# Altium PCB 智能笔 - 充电.PCBDOC
Units mil, origin at the board's own origin, x right, y up, seen from the top; angles counter-clockwise.
Board outline 953.67 x 396.67 mil, 2 copper layers (TopLayer, BottomLayer); 12 components, 40 nets, 45 pads, 21 vias.
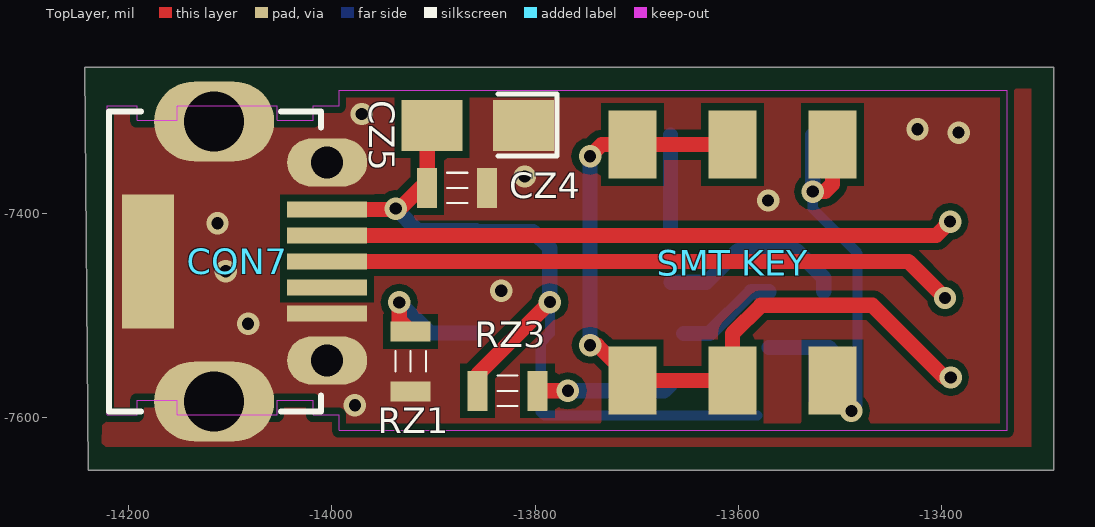
[diagram p0: TopLayer view]
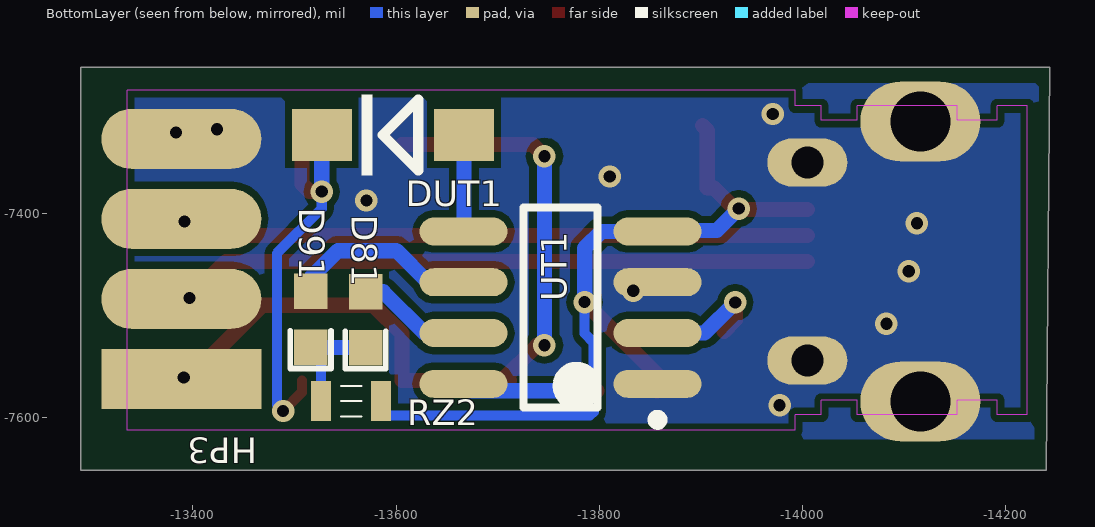
[diagram p1: BottomLayer view, seen from below]

## Layer stack, top to bottom
TopLayer: signal copper 1.4
Dielectric: core 12.6, FR-4, Dk 4.8
BottomLayer: signal copper 1.4

## Board outline
-14243.43,-7255.34 -13289.77,-7255.34 -13289.77,-7652.01 -14240.13,-7652.01

## Design rules (kind name [scope] priority, off if disabled: settings)
Clearance [All] p1: gap=7
ComponentClearance [All] p1 off: gap=10 collisioncheckmode=3
FanoutControl Fanout_LCC [All] p1 off: bgadir=Out bgaviamode=Centered fanoutstyle=Auto fanoutdirection=Alternating viagrid=1 // Protel DXP Scope 1 Expression Was: IsLCC   Fanout_LCC (Default Rule)
FanoutControl Fanout_BGA [All] p2 off: bgadir=Out bgaviamode=Centered fanoutstyle=Auto fanoutdirection=Alternating viagrid=1 // Protel DXP Scope 1 Expression Was: IsBGA   Fanout_BGA (Default Rule)
FanoutControl Fanout_SOIC [All] p3 off: bgadir=Out bgaviamode=Centered fanoutstyle=Auto fanoutdirection=Alternating viagrid=1 // Protel DXP Scope 1 Expression Was: IsSOIC   Fanout_SOIC (Default Rule)
FanoutControl Fanout_Default [All] p4: bgadir=Out bgaviamode=Centered fanoutstyle=Auto fanoutdirection=Alternating viagrid=1 // Fanout_Default (Default Rule)
FanoutControl Fanout_Small [All] p5 off: bgadir=Out bgaviamode=Centered fanoutstyle=Auto fanoutdirection=Alternating viagrid=1 // Protel DXP Scope 1 Expression Was: (CompPinCount < 5)   Fanout_Small (Default Rule)
PolygonConnect [All] p1: connectstyle=Direct reliefconductorwidth=10 reliefentries=4 polygonreliefangle="90 Angle"
RoutingVias [All] p1: holewidth=28 width=50 viastyle="Through Hole" minholewidth=28 minwidth=50 maxholewidth=28 maxwidth=50
SolderMaskExpansion [All] p1: expansion=4
TestPointUsage [All] p1: valid=0 allowmultiple=FALSE
Testpoint [(IsPad And (OnTopLayer Or OnBottomLayer))] p1: side=3 testpointundercomponent=TRUE minsize=40 maxsize=100 preferedsize=60 minholesize=20 maxholesize=40 preferedholesize=32 testpointgrid=1 style=297 order=-539222988
Width [All] p1: maxlimit=1111 minlimit=1 preferedwidth=10
12 further rules are at their usual default settings.

## Components (designator, comment, footprint, x,y, rotation, side; value= is the part's Value field where it differs from the comment)
CON7 "ZX62RD-AB-5P8" MICROUSB-B-H4 -14004.8,-7395.55 r0 top
CZ4 "104" 0603-1 -13876.8,-7374.41 r180 top
CZ5 "106" 0805 -13811.5,-7312.91 r180 top
D81 "LED_Red" 0603 -13569.89,-7503.53 r90 bottom
D91 "LED_Green" 0603 -13515.9,-7503.05 r90 bottom
DUT1 "SS14" DIODE_SOP -13666.82,-7322.28 r0 bottom
HP3 "Header 4" "2.0 4P 焊盘" -13388.57,-7562.33 r0 bottom
RZ1 "2K" 0603-1 -13922.66,-7545.1 r270 top
RZ2 "1.5K" 0603-1 -13555.73,-7584.21 r0 bottom
RZ3 "10K" 0603-1 -13827.22,-7574.08 r0 top
"SMT KEY" "Header 3X2" 拨动开关 -13507.27,-7331.67 r270 top locked
UT1 "TP4056" SOP-8P -13857.3,-7567.16 r0 bottom

## Footprints (in the part's own frame and the unit in brackets; to place one, negate y for a bottom-side part, rotate by r counter-clockwise, add the part's x,y. Pads: shape width x height; smd on the part's side, far side on the other; paste and mask are expansions set on the pad)
"2.0 4P 焊盘" [mm]
  rect 4x1.5 smd: 1(0,0)
  oval 4x1.5 smd: 2(0,-2) 3(0,-4) 4(0,-6)
0603 [mil]
  rect 35x33 smd: 1(-28,0) 2(27,0)
  silkscreen extent -49,-20 -12,20
0603-1 [mm] "1.6mm*0.8mm*0.8mm"
  rect 0.5x1 smd: 1(-0.75,0) 2(0.75,0)
  silkscreen extent -0.25,-0.38 0.25,0.38
0805 [mil]
  rect 60x50 smd: 1(0,0) 2(90,0)
  silkscreen extent -33,-31 25,30
DIODE_SOP [mm]
  rect 1.5x1.3 smd: 1(0,0) 2(3.556,0)
  silkscreen extent 1.14,-1.02 2.56,1.02
MICROUSB-B-H4 [mm]
  rect 2x0.4 smd: 1(0,0) 2(0,-0.65) 3(0,-1.3) 4(0,-1.95) 5(0,-2.6)
  oval 2x1.2 hole 0.8: 6(0,1.175) 7(0,-3.775)
  oval 3x2 hole 1.5: 8(-2.825,2.2) 9(-2.825,-4.8)
  rect 1.3x3.35 smd: 10(-4.48,-1.3)
  silkscreen extent -5.45,-5.05 2.51,2.45
SOP-8P [mm]
  oval 2.2x0.7 smd: 1(0,0) 2(0,-1.27) 3(0,-2.54) 4(0,-3.81) 5(4.85,-3.81) 6(4.85,-2.54) 7(4.85,-1.27) 8(4.85,0)
  silkscreen extent -0.12,-4.41 3.35,1.02
拨动开关 [mm]
  rect 1.7x1.2 smd: 1(0,0) 2(5.9,0) 3(0,-2.5) 4(5.9,-2.5) 5(0,-5) 6(5.9,-5)
  round 1 on Top Overlay: 16(1.469,0.003)

## Part data
CON7: library part ZX62RD-AB-5P8_4
CZ4: "Capacitor"
CZ5: library part 104, "Capacitor"
D81 D91: library part LED1, "Typical RED GaAs LED"
DUT1: library part "Diode 1N4001", "1 Amp General Purpose Rectifier"
HP3: "Header, 4-Pin"
RZ1 RZ2 RZ3: library part Res2, "Resistor"
"SMT KEY": "Header, 3-Pin, Dual row"

## Via types
v1: diameter 22, hole 12, TopLayer to BottomLayer, 21 vias

## Nets (pads, with @x,y where several pads share a name; then routed paths per layer and width w, separated by ;. In a path a pad name is that pad's centre, name@x,y a point inside that pad or via, vN(x,y) a via of type N, cw(c..) or ccw(c..) an arc to the next point about the centre after c; other vN are vias at no path point)
3.3V: 
GND: CON7.5 CON7.6 CON7.7 CON7.8 CON7.9 CON7.10 CZ4.1 CZ5.1 HP3.4 RZ1.2 UT1.1 UT1.3
  other v1: -13977.45,-7588.29 -14082.57,-7507.96 -13833.49,-7475.51 -14104.62,-7456.32 -14112.62,-7409.13 -13570.71,-7386.78 -13810.29,-7363.14 -13383.24,-7319.88 -13423.7,-7316.68 -13970.65,-7301.56
NetCU3_2: 
NetCY1_1: 
NetCY1_2: 
NetCY2_1: 
NetCY2_2: 
NetCY5_2: 
NetCY6_1: 
NetCY7_1: 
NetD81_1: D81.1 D91.1 RZ2.2 | length 114.9
  BottomLayer w10: D91.1@-13526.31,-7531.53 -13526.21,-7531.64 RZ2.2
  BottomLayer w15: D81.1 -13510.91,-7531.53 D91.1@-13508.63,-7533.81
NetD81_2: D81.2 UT1.7 | length 100.9
  BottomLayer w15: UT1.7@-13653.81,-7517.59 -13628.36,-7517.59 -13587.3,-7476.53 D81.2
NetD91_2: D91.2 UT1.6 | length 187.5
  BottomLayer w15: UT1.6 -13631.29,-7467.16 -13600.25,-7436.12 -13542.79,-7436.12 -13515.9,-7463 D91.2
NetDUT1_1: DUT1.1 UT1.5 | length 95.1
  BottomLayer w15: DUT1.1 -13666.82,-7416.7 UT1.5
NetDUT1_2: "SMT KEY.1" "SMT KEY.2" DUT1.2 | length 391.6
  TopLayer w10: -13507.27,-7563.95 -13507.27,-7575.4 v1(-13488.76,-7593.91)
  TopLayer w15: v1(-13526.82,-7377.95) -13514.59,-7377.95 -13507.27,-7370.63 -13507.27,-7331.67
  BottomLayer w10: v1(-13526.82,-7377.95) -13526.82,-7394.62 -13482.66,-7438.78 -13482.66,-7587.81 v1(-13488.76,-7593.91)
  BottomLayer w15: v1(-13526.82,-7377.95) DUT1.2
NetDV1_1: 
NetDV3_1: 
NetRY4_2: 
NetRZ1_1: RZ1.1 UT1.2 | length 122.2
  TopLayer w15: v1(-13933.81,-7487) -13933.81,-7504.43 RZ1.1
  BottomLayer w15: v1(-13933.81,-7487) -13903.64,-7517.16 UT1.2
NetRZ3_2: RZ3.2 UT1.8 | length 134.2
  TopLayer w15: RZ3.2 v1(-13767.81,-7574.08)
  BottomLayer w15: v1(-13767.81,-7574.08) -13673.27,-7574.08 UT1.8
NRST: 
PA1: 
PA2: 
PA3: 
PB4: 
PB5: 
PC3: 
PC4: 
PC5: 
PC6: 
PC7: 
PD1: 
PD2: 
PD3: 
PD4: 
PD5: CON7.3 HP3.2 | length 623.1
  TopLayer w15: CON7.3 -13432.63,-7446.73 v1(-13396.63,-7482.72)
PD6: CON7.2 HP3.3 | length 618.8
  TopLayer w15: CON7.2 -13405.24,-7421.14 v1(-13391.63,-7407.53)
VCC+4.2V: "SMT KEY.3" "SMT KEY.4" "SMT KEY.5" "SMT KEY.6" HP3.1 | length 794.9
  TopLayer w15: v1(-13745.94,-7529.19) -13738.89,-7529.19 -13704.12,-7563.95 ; v1(-13745.94,-7343.11) -13734.5,-7331.67 -13605.7,-7331.67 ; -13711.45,-7563.95 -13605.7,-7563.95 -13605.7,-7517.67 -13577.94,-7489.91 -13467.97,-7489.91 -13397,-7560.89 v1(-13391,-7560.89)
  BottomLayer w15: v1(-13745.94,-7529.19) v1(-13745.94,-7343.11)
XuotgID: CON7.4
XuotgVBUS: CON7.1 CZ4.2 CZ5.2 RZ2.1 RZ3.1 UT1.4 | length 833.7
  TopLayer w15: CON7.1 -13934.19,-7395.55 -13913.06,-7374.41 CZ4.2 -13906.33,-7317.74 CZ5.2 ; RZ3.1 -13856.74,-7557.93 v1(-13785.57,-7486.75)
  BottomLayer w10: v1(-13785.57,-7486.75) -13785.57,-7517.72 -13794.56,-7526.71 -13794.56,-7594.79 -13790.92,-7598.43 RZ2.1@-13581.18,-7598.43
  BottomLayer w15: v1(-13937.21,-7394.73) -13915.63,-7416.32 UT1.4@-13858.27,-7416.32 ; UT1.4 -13802.09,-7417.16 -13785.57,-7433.69 v1(-13785.57,-7486.75)
pads on no net: "SMT KEY.16"

## Polygon pours and split planes (outlines as drawn)
GND on TopLayer (solid, remove dead copper): -14223.36,-7276.9 -13311.53,-7276.9 -13311.53,-7629.34 -14226.47,-7629.34
GND on BottomLayer (solid, remove dead copper): -14232.69,-7271.46 -13313.08,-7271.46 -13313.08,-7621.56 -14228.02,-7621.56

## Keep-outs
KeepOutLayer:
  lines w0.13: -13414.29,-7612.98 -13993.03,-7612.98 ; -13414.29,-7278.34 -13993.03,-7278.34 ; -14018.62,-7597.62 -13993.03,-7597.62 ; -14018.62,-7597.62 -14018.62,-7583.45 -14054.06,-7583.45 -14054.06,-7597.62 -14152.48,-7597.62 -14152.48,-7583.45 -14191.85,-7583.45 -14191.85,-7597.62 -14221.38,-7597.62 -14221.38,-7293.7 -14191.85,-7293.7 -14191.85,-7307.86 -14152.48,-7307.86 -14152.48,-7293.7 -14054.06,-7293.7 -14054.06,-7307.86 -14018.62,-7307.86 -14018.62,-7293.7 ; -14018.62,-7597.62 -13993.03,-7597.62 ; -14018.62,-7293.7 -13993.03,-7293.7 ; -14018.62,-7293.7 -13993.03,-7293.7 ; -13993.03,-7612.98 -13993.03,-7597.62 ; -13993.03,-7612.98 -13335.55,-7612.98 -13335.55,-7278.34 -13993.03,-7278.34 ; -13993.03,-7612.98 -13993.03,-7597.62 ; -13993.03,-7293.7 -13993.03,-7278.34 ; -13993.03,-7293.7 -13993.03,-7278.34

## Text inside footprints (layer, text, board x,y; h text height)
CON7: Mechanical10 "9" at -14134.92,-7584.52 h25; Mechanical10 "8" at -14134.92,-7308.93 h25; Mechanical10 "6" at -14023.7,-7349.29 h25